# Allegro board remotepanasonicDB9-rout-V1.1.brd
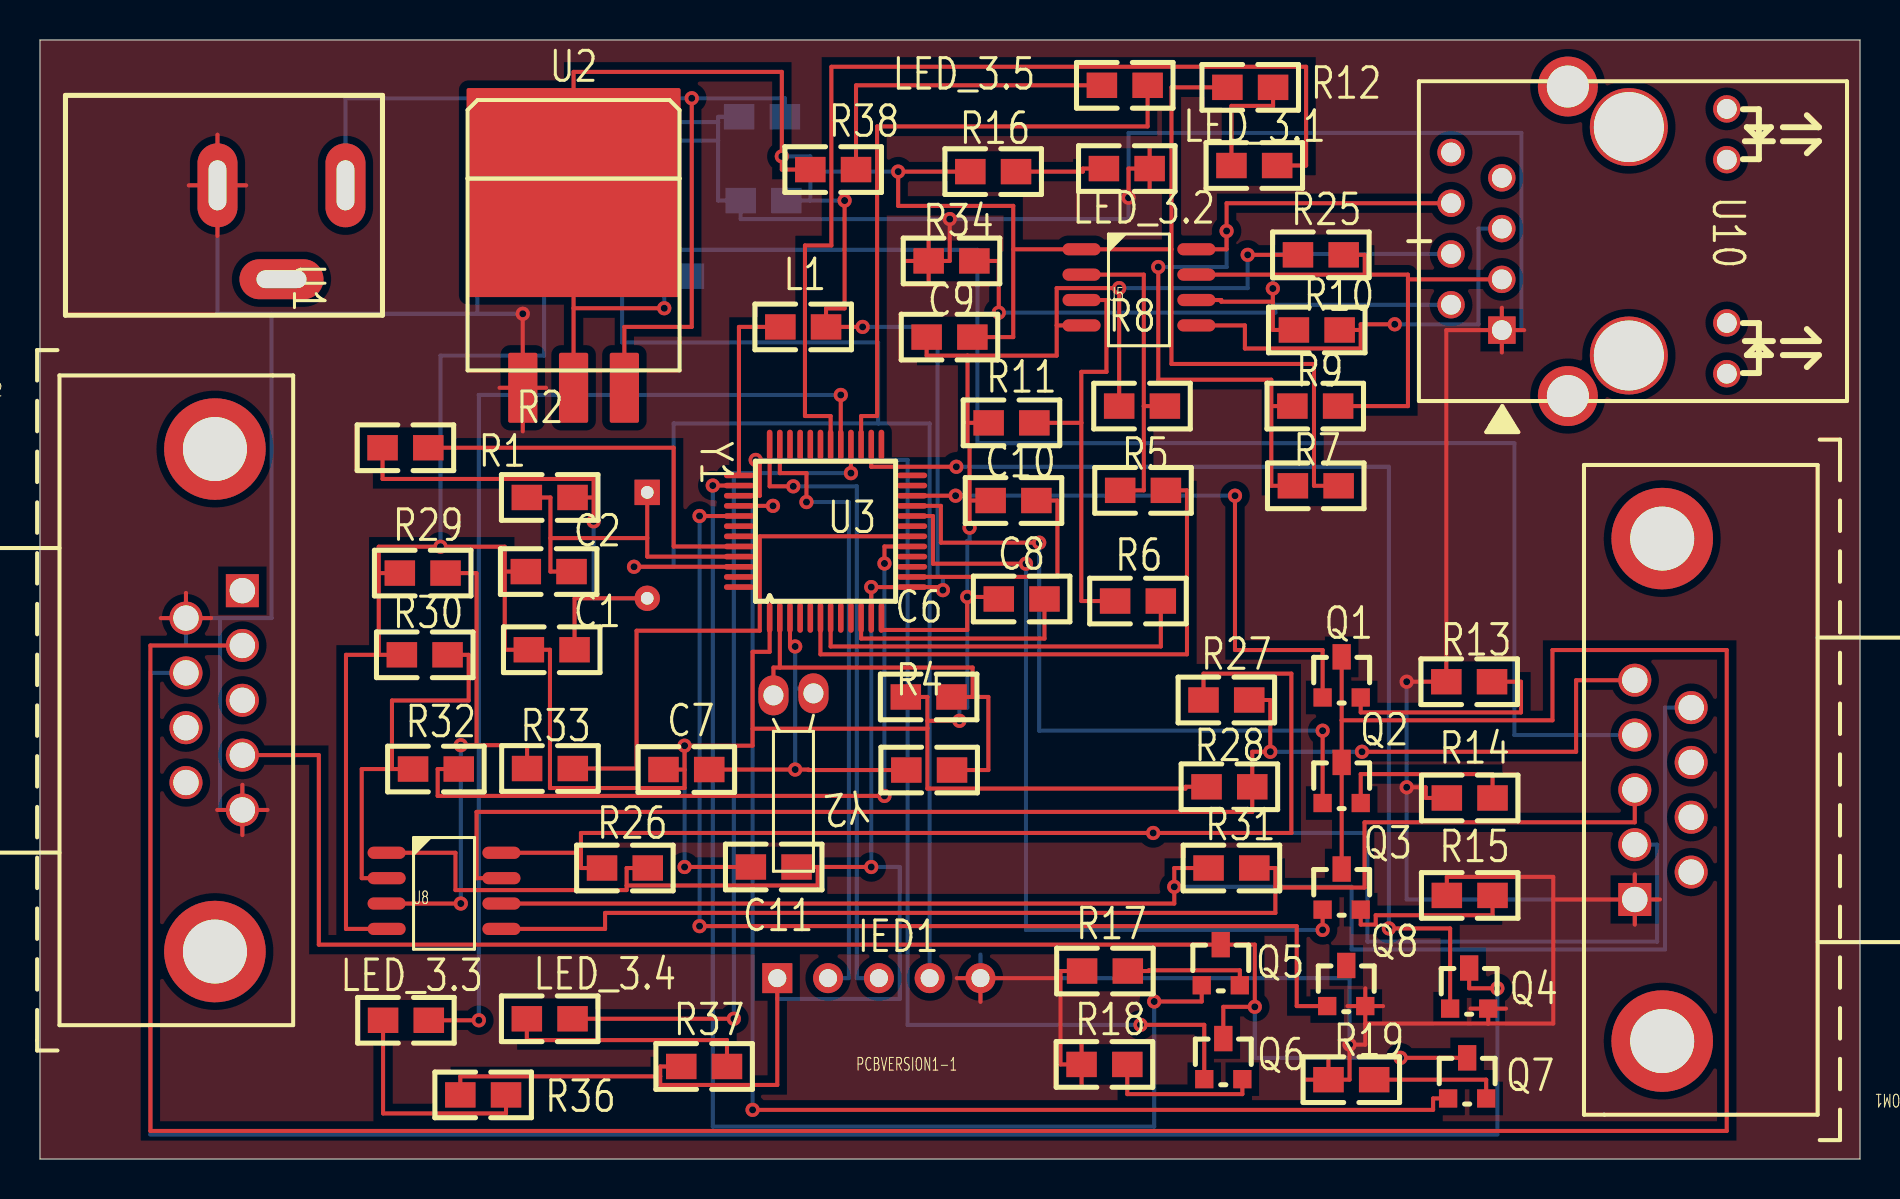
[diagram p0: board, top side]
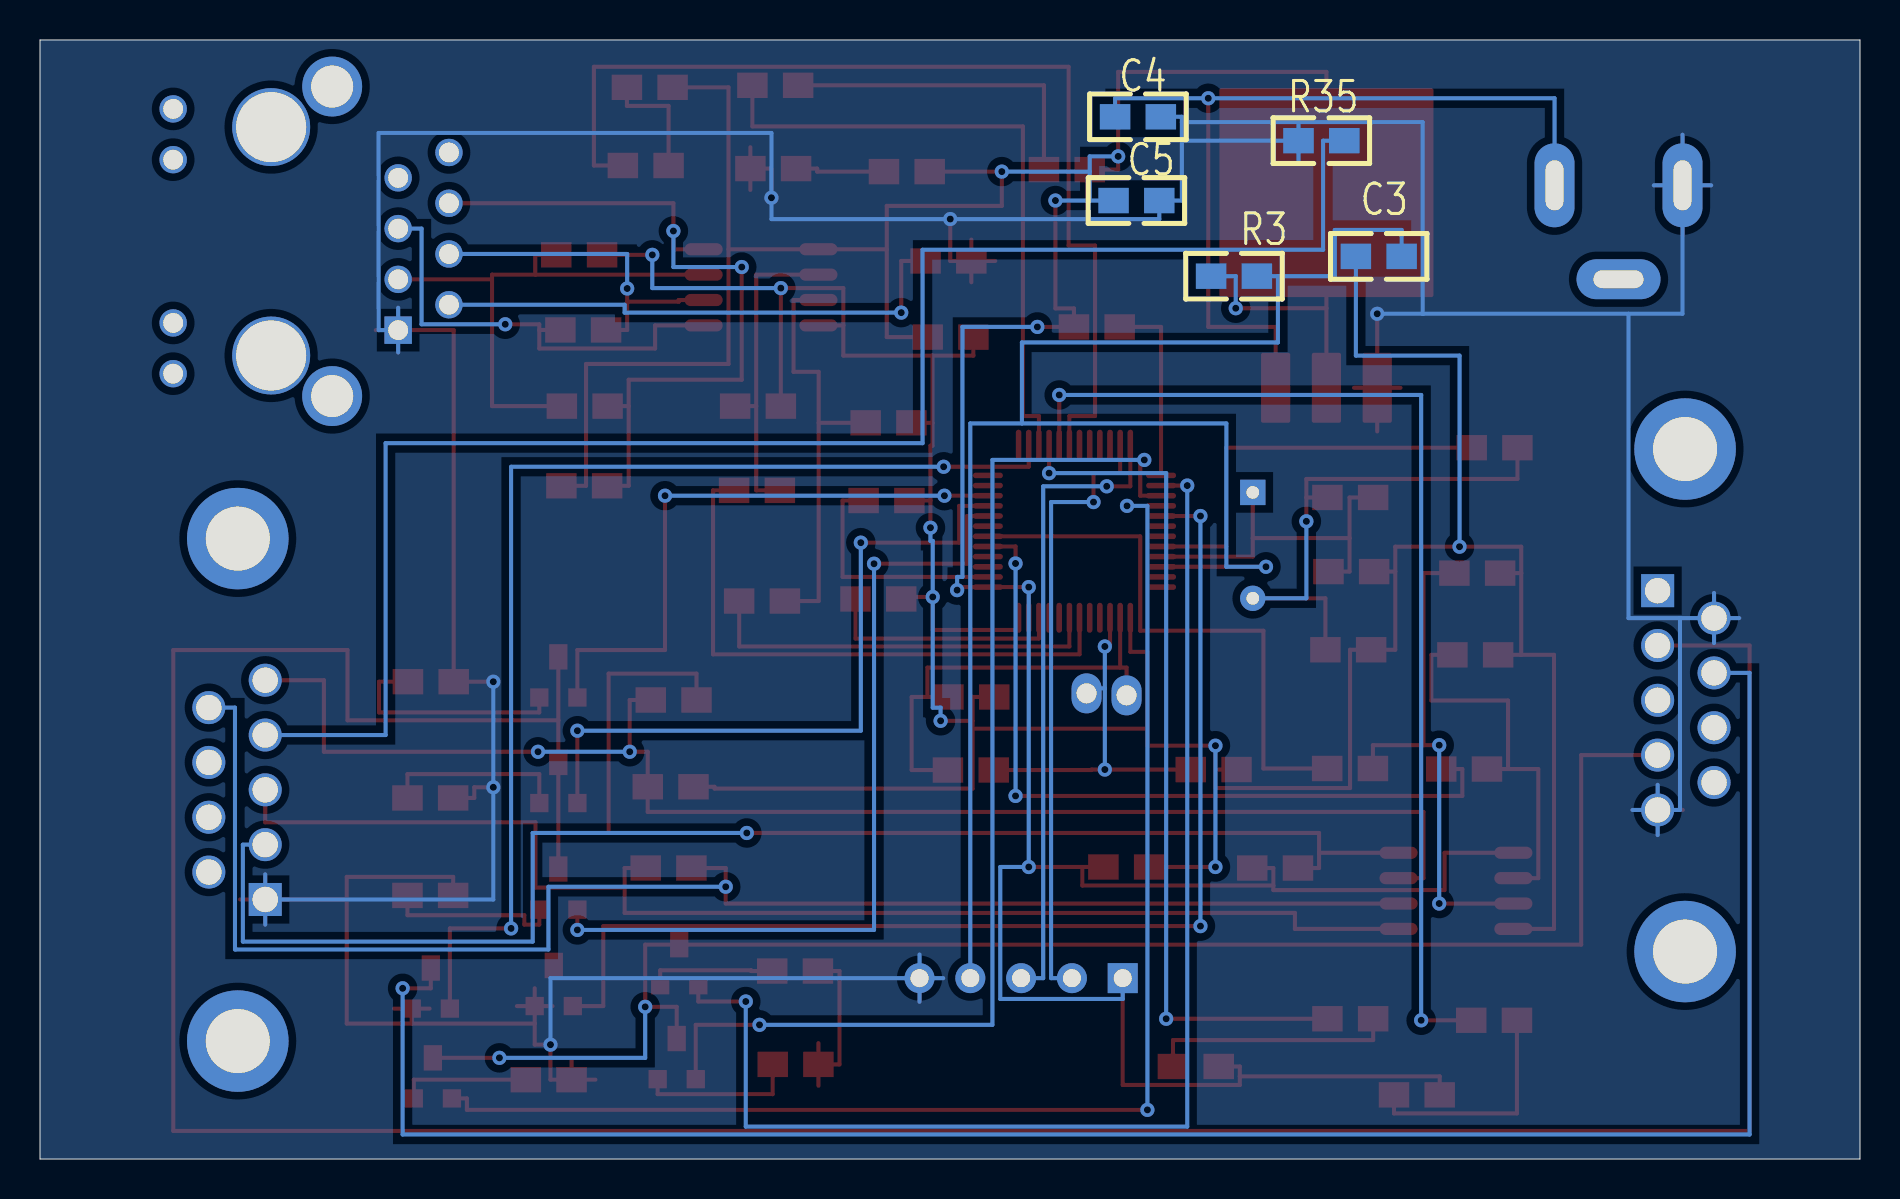
[diagram p1: board, bottom side, seen from below]

Outline 91 x 56 mm; copper layers: TOP, BOTTOM. Coordinates in mm from the lower left corner of the outline.
Outline path: 0,56 91,56 91,0 0,0 0,56

## Placement (name value [footprint] x y rotation side)
C1  20p  [0805]  25.59 25.49 0 top
C2  20p  [0805]  25.43 29.4 0 top
C3  10u  [0805]  24.06 45.17 180 bottom
C4  10U  [0805]  36.1 52.16 180 bottom
C5  22U  [0805]  36.18 47.96 180 bottom
C6  20p  [0805]  44.43 23.12 0 top
C7  20p  [0805]  32.32 19.49 0 top
C8  10u  [0805]  49.08 28.03 0 top
C9  0.1u  [0805]  45.47 41.13 0 top
C10  0.1u  [0805]  48.68 32.95 0 top
C11  0.1u  [0805]  36.69 14.61 0 top
COM1  BOXCONN_DB9  [DB9RA_M]  79.74 18.47 180 top
COM2  BOXCONN_DB9  [DB9RA_M]  10.12 22.96 0 top
IED1  <Value>  [HDR1X5]  36.86 9.05 0 top
L1  IND_MOLDED  [0805]  38.16 41.64 0 top
LED_3.1  RED  [0805]  60.71 49.72 0 top
LED_3.2  RED  [0805]  54.34 49.56 0 top
LED_3.3  RED  [0805]  18.3 6.94 0 top
LED_3.4  RED  [0805]  25.48 7.02 0 top
LED_3.5  RED  [0805]  54.24 53.73 0 top
Q1  2N7002LT1  [SOT23_B]  65.08 24.09 0 top
Q2  2N7002LT1  [SOT23_B]  65.08 18.81 0 top
Q3  2N7002LT1  [SOT23_B]  65.08 13.47 0 top
Q4  2N7002LT1  [SOT23_B]  71.46 8.52 0 top
Q5  2N7002LT1  [SOT23_B]  59.04 9.69 0 top
Q6  2N7002LT1  [SOT23_B]  59.17 4.99 0 top
Q7  2N7002LT1  [SOT23_B]  71.36 4.02 0 top
Q8  2N7002LT1  [SOT23_B]  65.31 8.65 0 top
R1  33  [0805]  18.27 35.59 0 top
R2  1M  [0805]  25.48 33.11 0 top
R3  10k  [0805]  31.3 44.18 180 bottom
R4  10M  [0805]  44.46 19.47 0 top
R5  22  [0805]  55.15 33.46 0 top
R6  22  [0805]  54.9 27.92 0 top
R7  4.7k  [0805]  63.79 33.69 0 top
R8  10k  [0805]  55.1 37.68 0 top
R9  100  [0805]  63.76 37.68 0 top
R10  100  [0805]  63.84 41.49 0 top
R11  10k  [0805]  48.57 36.84 0 top
R12  330  [0805]  60.51 53.63 0 top
R13  4.7k  [0805]  71.46 23.89 0 top
R14  10k  [0805]  71.48 18.07 0 top
R15  15k  [0805]  71.48 13.19 0 top
R16  330  [0805]  47.66 49.41 0 top
R17  4.7k  [0805]  53.25 9.41 0 top
R18  10k  [0805]  53.22 4.73 0 top
R19  15k  [0805]  65.57 3.97 0 top
R25  4.7k  [0805]  64.04 45.25 0 top
R26  4.7k  [0805]  29.24 14.56 0 top
R27  100  [0805]  59.32 22.97 0 top
R28  4.7k  [0805]  59.47 18.63 0 top
R29  10k  [0805]  19.13 29.32 0 top
R30  10k  [0805]  19.24 25.23 0 top
R31  100  [0805]  59.57 14.56 0 top
R32  22  [0805]  19.8 19.52 0 top
R33  22  [0805]  25.5 19.54 0 top
R34  0  [0805]  45.58 44.94 0 top
R35  0  [0805]  26.93 50.96 180 bottom
R36  330  [0805]  22.16 3.21 0 top
R37  330  [0805]  33.21 4.63 0 top
R38  330  [0805]  39.66 49.51 0 top
U1  DC205A  [DC205]  15.27 48.73 270 top
U2  AMS1086CM-3.3  [TO262]  26.68 45.09 0 top
U3  NUC122LC1AN  [NUC122LQFP48]  36.48 27.09 0 top
U5  MAX488  [SOP8]  52.08 45.53 0 top
U8  MAX488  [SOP8]  17.33 15.33 0 top
U10  RJ45  [HR911105A]  68.94 45.93 270 top
Y1  12M  [XALTDIP2]  30.36 33.36 270 top
Y2  32k  [XTAL-3_4MM-2P]  38.97 23.4 180 top

## Library data of the parts
C1-C3 C6-C11 = CAPACITOR NON-POL
C4 C5 = CAP NP
COM1 COM2 = CONNECTOR DB9_1
IED1 = CON5
L1 R1-R11 R13-R15 R17-R19 R25-R35 = R
LED_3.1-LED_3.5 = LED
Q1-Q8 = NPN_3
R12 R16 R36-R38 = RES1
U1 = DC205A
U2 = AMS1117: Tolerance: RichardLC; User Part Number: pn
U3 = NUC122LC1AN
U5 U8 = MAX485
U10 = RJ45
Y1 Y2 = CRYSTAL

## Footprints (pads in the part's own frame, mm; a bottom-side part is the same pattern mirrored in y, then rotated)
0805
  rect 1.524x1.27 smd: 1(-1.143,0) 2(1.143,0)
DB9RA_M
  rect 1.651x1.651 hole 1.27: 1(0,5.486)
  round 1.651 hole 1.27: 2(0,2.743) 3(0,0) 4(0,-2.743) 5(0,-5.486) 6(-2.819,4.115) 7(-2.819,1.372) 8(-2.819,-1.372) 9(-2.819,-4.115)
  round 5.08 hole 3.2: 10(-1.372,12.573) 11(-1.372,-12.573)
DC205
  oval 4.2x2 hole 2.5x0.889: 1(0,0) 2(0,-6.4)
  oval 2x4.2 hole 0.889x2.5: 3(4.7,-3.2)
HDR1X5
  rect 1.5x1.5 hole 0.9: 1(0,0)
  round 1.5 hole 0.9: 2(2.54,0) 3(5.08,0) 4(7.62,0) 5(10.16,0)
HR911105A
  round 3.9 hole 3.5 unplated: (-5.707,10.498) (5.723,10.498)
  rect 1.372x1.372 hole 0.991: 1(4.453,4.148)
  round 1.372 hole 0.991: 2(3.183,1.608) 3(1.913,4.148) 4(0.643,1.608) 5(-0.627,4.148) 6(-1.897,1.608) 7(-3.167,4.148) 8(-4.437,1.608) 9(6.633,15.398) 10(4.093,15.398) 11(-4.077,15.398) 12(-6.617,15.398)
  round 2.997 hole 2.1: M3(-7.737,7.448) M4(7.753,7.448)
NUC122LQFP48
  oval 0.279x1.5 smd: 1(0,0) 2(0.508,0) 3(1.016,0) 4(1.524,0) 5(2.032,0) 6(2.54,0) 7(3.048,0) 8(3.556,0) 9(4.064,0) 10(4.572,0) 11(5.08,0) 12(5.588,0) 25(5.588,8.66) 26(5.08,8.66) 27(4.572,8.66) 28(4.064,8.66) 29(3.556,8.66) 30(3.048,8.66) 31(2.54,8.66) 32(2.032,8.66) 33(1.524,8.66) 34(1.016,8.66) 35(0.508,8.66) 36(0,8.66)
  oval 1.5x0.279 smd: 13(7.124,1.536) 14(7.124,2.044) 15(7.124,2.552) 16(7.124,3.06) 17(7.124,3.568) 18(7.124,4.076) 19(7.124,4.584) 20(7.124,5.092) 21(7.124,5.6) 22(7.124,6.108) 23(7.124,6.616) 24(7.124,7.124) 37(-1.536,7.124) 38(-1.536,6.616) 39(-1.536,6.108) 40(-1.536,5.6) 41(-1.536,5.092) 42(-1.536,4.584) 43(-1.536,4.076) 44(-1.536,3.568) 45(-1.536,3.06) 46(-1.536,2.552) 47(-1.536,2.044) 48(-1.536,1.536)
SOP8
  oval 1.905x0.61 smd: 1(0,0) 2(0,-1.27) 3(0,-2.54) 4(0,-3.81) 5(5.74,-3.81) 6(5.74,-2.54) 7(5.74,-1.27) 8(5.74,0)
SOT23_B
  rect 0.914x1.27 smd: D(0,1.041)
  rect 0.914x0.914 smd: G(-0.953,-0.991) S(0.953,-0.991)
TO262
  custom 1.46x3.5 smd: 1(-2.54,-6.5) 2(0,-6.5) 3(2.54,-6.5)
  custom 10.7x10.46 smd: 4(0,3.27)
XALTDIP2
  rect 1.27x1.27 hole 0.635: 1(0,0)
  round 1.27 hole 0.635: 2(5.3,0)
XTAL-3_4MM-2P
  oval 1.5x2 hole 1: 1(0.3,0.1) 2(2.3,0.2)

## Nets
GND: C4.2 C5.2 COM1.1 COM2.5 COM2.6 IED1.5 LED_3.2.2 Q4.S Q8.S R13.1 R14.1 R15.1 R17.1 R18.1 R19.1 R34.1 R35.1 U1.2(GND) U2.1(GND) U10.1
GND_POWER: C1.1 C2.1 C3.1 C6.1 C7.1 C8.1 C9.1 C10.1 C11.1 R8.1 R11.1 R25.1 R28.1 R29.1 R30.1 U3.1(PVSS) U3.12(VSS) U5.4(GND) U8.4(GND)
VCC: C5.1 C9.2 C11.2 IED1.1 L1.2 R3.1 R7.2 R12.1 R16.1 R26.2 R36.1 R37.1 R38.1 U2.2(VOUT) U2.4(TAB) U3.11(VDD) U3.13(VBUS) U5.1(VCC) U8.1(VCC)
VCC5: C4.1 U1.1(VCC) U2.3(VIN)
422AI: R7.1 R9.1 U5.8(A) U10.6
422AO: COM1.2 R26.1 R27.1 U8.8(A)
422BI: R9.2 R25.2 U5.7(B) U10.3
422BO: COM1.5 R27.2 R28.2 U8.7(B)
422YI: R10.2 U5.5(Y) U10.5
422YO: COM1.3 R31.2 U8.5(Y)
422ZI: R10.1 U5.6(Z) U10.4
422ZO: COM1.9 R31.1 U8.6(Z)
A_AUDIO: COM2.7 Q4.D
A_AUDIO-1: Q8.D
A_INPUT: Q4.G U3.26(PC12)
A_INPUT1: Q8.G U3.41(PD3)
B_AUDIO: COM2.2 Q1.D Q2.D Q3.D
B_AUDIO-1: COM2.4 Q5.D Q6.D Q7.D
B_NET1: Q1.G U3.22(PC0/SPISS00)
B_NET2: Q2.G U3.21(PC1/SPICLK0)
B_NET3: Q3.G U3.20(PC2/MISO00)
B_NET11: Q5.G U3.38(PD0)
B_NET21: Q6.G U3.39(PD1)
B_NET31: Q7.G U3.40(PD2)
ICECLK: IED1.3 U3.36(ICE_CK)
ICEDATA: IED1.2 U3.35(ICE_DAT)
ICEREST: C3.2 IED1.4 R3.2 U3.46(/RESET)
PC8: LED_3.1.2 U3.30(PC8/SPISS10)
PC9: LED_3.3.2 U3.29(PC9/SPICLK1)
PC10: LED_3.4.2 U3.28(PC10/MISO10)
PC11: LED_3.5.2 U3.27(PC11/MOS110)
RXI: R5.1 R8.2 U5.2(RO)
RXO: R30.2 R32.1 U8.2(RO)
TXI: R6.1 R11.2 U5.3(DI)
TXO: R29.2 R33.1 U8.3(DI)
N5217252: C1.2 R1.1 R2.2 Y1.2
N5217271: C2.2 R2.1 U3.45(XT1_IN) Y1.1
N5217301: R1.2 U3.44(XT1_OUT)
N5217606: L1.1 U3.37(AVDD)
N5217811: C6.2 R4.2 U3.2(X32O) Y2.2
N5217823: C7.2 R4.1 U3.3(X321) Y2.1
N5218166: R5.2 U3.6(RXD1/PB4)
N5218170: R6.2 U3.7(TXD1/PB5)
N5218267: C8.2 U3.10(LDO)
N5218423: C10.2 U3.14(VDD33)
N5271660: Q1.S R13.2
N5271664: Q2.S R14.2
N5271668: Q3.S R15.2
N5281203: Q5.S R17.2
N5281215: Q7.S R19.2
N5281219: Q6.S R18.2
N5286003: R32.2 U3.17(PB0/RXD0)
N5286012: R33.2 U3.18(PB1/TXD0)
N5287388: R34.2 U10.2
N5287624: COM1.4 R35.2
N5293616: COM2.11
N5294368: COM2.3
N52191170: LED_3.2.1 R16.2
N52191690: LED_3.1.1 R12.2
N52878630: LED_3.3.1 R36.2
N52879570: LED_3.4.1 R37.2
N52880520: LED_3.5.1 R38.2

Pads without a net: COM1 6 7 8 10 11; COM2 1 8 9 10; U1 3; U3 4 5 8 9 15 16 19 23 24 25 31 32 33 34 42 43 47 48; U10 7 8 9 10 11 12 M3 M4

## Via types
v1: diameter 0.711, hole 0.356, TOP to BOTTOM, 65 vias

## Routing (per net, layer and track width the routed paths; a pad name or vN(x,y) marks a point on that pad's centre or on a via; arc(x,y) is an arc through that point)
GND: length 331.8
  TOP w0.203: U10.1 73.09,42.6 ; U10.1 74.21,41.48 ; U10.1 70.32,41.48 R13.1 v1(68.33,23.89) ; U10.1 73.09,40.36 ; U2.1 v1(24.14,42.3) ; U2.1 22.98,38.59 ; U2.1 24.14,36.41 ; U2.1 25.3,38.59 ; 45.84,9.05 IED1.5 ; IED1.5 47.02,7.87 ; IED1.5 51.02,9.05 ; 75.66,12.99 COM1.1 ; 75.66,12.99 75.66,14.12 70.34,14.12 R15.1 ; 75.66,12.99 75.66,6.78 72.41,6.78 ; COM1.1 79.74,14.25 ; COM1.1 79.74,11.73 ; COM1.1 81,12.99 ; 71.52,7.53 Q4.S ; Q4.S 73.3,7.53 ; Q4.S 72.41,6.78 ; R34.1 45.49,44.94 v1(45.49,47.04) ; R34.1 43.24,44.94 ; R34.1 44.43,43.87 ; R34.1 44.43,46.01 ; R19.1 65.48,3.97 v1(65.48,5.72) 66.26,5.72 66.26,6.78 ; R19.1 64.42,5.04 ; R19.1 63.23,3.97 ; 51.02,9.05 51.02,9.41 R17.1 ; 51.02,9.05 51.02,4.73 R18.1 ; COM2.6 8.56,27.07 ; COM2.6 7.3,28.33 ; COM2.6 6.04,27.07 ; R18.1 52.08,3.67 ; R18.1 52.08,5.8 ; LED_3.2.2 54.43,49.56 v1(54.43,48.1) ; LED_3.2.2 55.48,48.5 ; LED_3.2.2 55.48,50.63 ; 8.87,46.19 U1.2 ; U1.2 7.44,48.73 ; U1.2 8.87,51.26 ; U1.2 10.31,48.73 ; v1(68.33,18.6) 69.29,18.6 69.29,18.07 R14.1 ; 10.12,16.21 COM2.5 ; COM2.5 8.86,17.47 ; COM2.5 10.12,18.73 ; COM2.5 11.38,17.47 ; 65.38,7.65 Q8.S ; Q8.S 67.15,7.65 ; Q8.S 66.26,6.78 ; Q8.S 66.26,8.54 ; 72.41,6.78 66.26,6.78
  BOTTOM w0.203: 33.9,50.96 33.9,47.96 C5.2 35.04,47.04 v1(45.49,47.04) 54.43,47.04 v1(54.43,48.1) 54.43,51.35 74.07,51.35 74.07,41.48 U10.1 ; 33.9,50.96 R35.1 ; 33.9,50.96 33.9,51.89 ; 28.08,49.89 R35.1 ; R35.1 28.08,52.03 ; 10.12,16.21 COM2.5 ; COM2.5 9,17.47 9,27.07 ; COM2.5 11.38,17.47 ; COM2.5 10.12,18.73 ; 45.84,9.05 IED1.5 ; IED1.5 47.02,10.23 ; IED1.5 65.48,9.05 v1(65.48,5.72) ; IED1.5 47.02,7.87 ; U10.1 73.09,42.6 ; U10.1 73.09,40.36 ; 9,27.07 11.58,27.07 11.58,42.3 ; 9,27.07 COM2.6 ; 79.74,11.73 COM1.1 ; COM1.1 68.33,12.99 v1(68.33,18.6) v1(68.33,23.89) ; COM1.1 79.74,14.25 ; 11.58,42.3 8.87,42.3 U1.2 ; 11.58,42.3 21.87,42.3 ; 7.3,25.81 COM2.6 ; COM2.6 6.04,27.07 ; COM2.6 7.3,28.33 ; 21.87,42.3 21.87,51.89 33.9,51.89 ; 21.87,42.3 v1(24.14,42.3) ; 33.9,51.89 33.9,52.16 C4.2 ; U1.2 7.44,48.73 ; U1.2 8.87,51.26 ; U1.2 10.31,48.73
GND_POWER: length 187.3
  TOP w0.203: R28.1 57.27,18.63 57.27,18.54 44.37,18.54 44.37,21.54 ; v1(45.97,21.93) 44.37,21.93 ; 44.37,21.93 44.37,23.12 C6.1 ; 44.37,21.93 44.37,21.54 ; 35.63,21.54 35.63,25.38 36.48,25.38 U3.1 ; 35.63,21.54 44.37,21.54 ; 35.63,21.54 35.63,20.68 v1(32.23,20.68) 32.23,19.49 ; 23.24,29.4 23.24,30.64 v1(20.02,30.64) 16.94,30.64 16.94,29.32 ; 23.24,29.4 23.24,25.49 C1.1 25.5,25.49 25.5,18.56 32.23,18.56 32.23,19.49 ; 23.24,29.4 C2.1 ; U3.12 42.07,26.48 46.36,26.48 v1(46.36,28.13) 47.94,28.13 C8.1 ; C11.1 v1(32.23,14.61) ; C9.1 44.33,40.2 46.38,40.2 ; 50.83,41.72 50.83,40.2 46.38,40.2 ; 50.83,41.72 50.83,43.58 v1(53.96,43.58) R8.1 ; 50.83,41.72 U5.4 ; 46.38,36.84 46.38,35.7 46.48,35.7 46.48,32.95 ; 46.38,36.84 46.38,40.2 ; 46.38,36.84 R11.1 ; 46.48,32.95 v1(46.48,31.59) ; 46.48,32.95 C10.1 ; 32.23,19.49 C7.1 ; R29.1 16.94,29.32 ; 16.94,29.32 16.94,25.23 ; 16.94,25.23 15.3,25.23 15.3,11.52 U8.4 ; 16.94,25.23 R30.1 ; R25.1 v1(60.38,45.25)
  BOTTOM w0.203: v1(53.96,43.58) 60.38,43.58 v1(60.38,45.25) ; v1(32.23,14.61) v1(32.23,20.68) ; v1(46.48,31.59) 46.48,30.93 46.36,30.93 v1(46.36,28.13) 46.36,22.59 45.97,22.59 v1(45.97,21.93) ; v1(20.02,30.64) 20.02,40.2 25.21,40.2 C3.1
VCC: length 224.6
  TOP w0.203: v1(40.23,47.96) 40.23,42.57 39.3,42.57 L1.2 v1(41.13,41.64) ; 38.88,14.61 38.88,13.69 29.33,13.69 ; 38.88,14.61 v1(41.56,14.61) ; 38.88,14.61 C11.2 ; 56.57,45.53 56.57,39.79 63.7,39.79 63.7,33.69 R7.2 ; 56.57,45.53 56.57,53.63 R12.1 ; 56.57,45.53 U5.1 48.66,45.53 ; 29.33,13.69 29.33,14.56 R26.2 ; 29.33,13.69 29.33,13.46 20.77,13.46 20.77,15.33 U8.1 ; 26.68,42.58 v1(31.21,42.58) ; 26.68,42.58 U2.4 26.68,54.4 37.09,54.4 v1(37.09,50.17) 37.09,49.51 R38.1 ; 26.68,42.58 U2.2 ; 31.01,4.14 31.01,3.7 36.86,3.7 IED1.1 ; 31.01,4.14 31.01,4.63 R37.1 ; 31.01,4.14 21.01,4.14 R36.1 ; 48.66,45.53 48.66,47.7 42.91,47.7 v1(42.91,49.41) R16.1 ; 48.66,45.53 48.66,41.13 C9.2 ; v1(45.14,28.47) 45.14,28.62 U3.13 v1(41.56,28.62) U3.11
  BOTTOM w0.203: 38.52,49.41 v1(42.91,49.41) ; 38.52,49.41 38.52,50.17 v1(37.09,50.17) ; 38.52,49.41 38.52,47.96 ; v1(41.56,28.62) v1(41.56,14.61) 42.99,14.61 42.99,8.01 36.86,8.01 IED1.1 ; C5.1 38.52,47.96 ; 38.52,47.96 v1(40.23,47.96) ; v1(31.21,42.58) 31.21,44.18 R3.1 ; v1(41.13,41.64) 44.88,41.64 44.88,29.13 45.14,29.13 v1(45.14,28.47)
VCC5: length 45.1
  TOP w0.203: U2.3 29.22,41.64 32.59,41.64 v1(32.59,53.08)
  BOTTOM w0.203: 37.25,52.16 37.25,53.08 v1(32.59,53.08) 15.27,53.08 U1.1
422AI: length 39
  TOP w0.203: R9.1 61.57,37.68 ; 61.57,37.68 61.57,33.69 R7.1 ; 61.57,37.68 61.57,39 55.91,39 v1(55.91,44.64) ; 57.82,45.53 59.33,45.53 v1(59.33,46.44) 59.33,47.83 U10.6
  BOTTOM w0.203: v1(55.91,44.64) 59.33,44.64 v1(59.33,46.44)
422AO: length 92.6
  TOP w0.203: U8.8 27.05,15.33 ; 27.05,15.33 27.05,14.56 R26.1 ; 27.05,15.33 27.05,16.32 v1(55.66,16.32) 62.57,16.32 62.57,24.29 58.17,24.29 R27.1
  BOTTOM w0.203: COM1.2 80.86,15.73 80.86,10.88 66.37,10.88 66.37,16.32 v1(55.66,16.32)
422BI: length 27.4
  TOP w0.203: 68.4,44.02 68.4,44.26 66.24,44.26 ; 68.4,44.02 68.4,37.68 R9.2 ; 68.4,44.02 U10.3 ; 66.24,44.26 66.24,45.25 65.19,45.25 ; 66.24,44.26 57.82,44.26
422BO: length 72.7
  TOP w0.203: R27.2 61.51,22.97 v1(61.51,20.38) 60.61,20.38 60.61,17.37 21.83,17.37 21.83,14.06 U8.7 ; v1(66.1,20.38) 76.81,20.38 76.81,23.96 COM1.5
  BOTTOM w0.203: v1(66.1,20.38) v1(61.51,20.38)
422YI: length 23.5
  TOP w0.203: 66.04,41.49 66.04,40.56 60.24,40.56 60.24,41.72 57.82,41.72 ; 66.04,41.49 R10.2 ; 66.04,41.49 66.04,41.77 v1(67.74,41.77)
  BOTTOM w0.203: v1(67.74,41.77) 71.92,41.77 71.92,46.56 U10.5
422YO: length 65.7
  TOP w0.203: COM1.3 79.74,16.85 66.23,16.85 66.23,13.59 61.77,13.59 ; 61.77,13.59 61.77,12.32 28.25,12.32 28.25,11.52 U8.5 ; 61.77,13.59 61.77,14.56 R31.2
422ZI: length 17.7
  TOP w0.203: R10.1 61.64,41.49 61.64,42.9 ; 61.64,42.9 59.06,42.9 59.06,42.99 57.82,42.99 ; 61.64,42.9 v1(61.64,43.56)
  BOTTOM w0.203: U10.4 61.64,45.29 v1(61.64,43.56)
422ZO: length 78.2
  TOP w0.203: U8.6 56.71,12.79 v1(56.71,13.62) 56.71,14.56 R31.1
  BOTTOM w0.203: v1(56.71,13.62) 65.58,13.62 65.58,10.49 81.25,10.49 81.25,22.59 COM1.9
A_AUDIO: length 102
  TOP w0.203: v1(72.87,8.54) 71.46,8.54 Q4.D
  BOTTOM w0.203: COM2.7 5.52,24.33 5.52,1.23 72.87,1.23 v1(72.87,8.54)
A_INPUT: length 57.2
  TOP w0.203: U3.26 41.56,34.64 v1(45.82,34.64) ; Q4.G 70.51,11.54 v1(67.45,11.54)
  BOTTOM w0.203: v1(45.82,34.64) 67.45,34.64 v1(67.45,11.54)
A_INPUT1: length 57.9
  TOP w0.203: Q8.G 62.84,7.65 62.84,11.66 v1(32.98,11.66) ; U3.41 v1(32.98,32.18)
  BOTTOM w0.203: v1(32.98,32.18) v1(32.98,11.66)
B_AUDIO: length 165.2
  TOP w0.203: 65.08,21.95 75.62,21.95 75.62,25.47 84.34,25.47 84.34,1.41 5.52,1.41 5.52,25.7 COM2.2 ; 65.08,21.95 Q2.D Q3.D ; 65.08,21.95 Q1.D
B_AUDIO-1: length 79.6
  TOP w0.203: Q6.D 59.17,7.62 v1(60.74,7.62) 60.74,10.73 Q5.D 13.94,10.73 13.94,20.21 COM2.4 ; Q7.D v1(68.03,5.06)
  BOTTOM w0.203: v1(68.03,5.06) 60.74,5.06 v1(60.74,7.62)
B_NET1: length 30.6
  TOP w0.203: v1(59.75,33.19) 59.75,25.47 64.13,25.47 Q1.G ; U3.22 v1(45.78,33.19)
  BOTTOM w0.203: v1(45.78,33.19) v1(59.75,33.19)
B_NET2: length 35.4
  TOP w0.203: v1(49.96,30.84) 45.04,30.84 45.04,32.69 U3.21 ; Q2.G v1(64.13,21.43)
  BOTTOM w0.203: v1(64.13,21.43) 49.96,21.43 v1(49.96,30.84)
B_NET3: length 42.3
  TOP w0.203: Q3.G v1(64.13,11.46) ; v1(49.3,29.79) 44.65,29.79 44.65,32.18 U3.20
  BOTTOM w0.203: v1(64.13,11.46) 49.3,11.46 v1(49.3,29.79)
B_NET11: length 64.9
  TOP w0.203: v1(55.71,7.88) 58.09,7.88 Q5.G ; U3.38 v1(33.64,33.7)
  BOTTOM w0.203: v1(33.64,33.7) 33.64,1.62 55.71,1.62 v1(55.71,7.88)
B_NET21: length 56.5
  TOP w0.203: U3.39 35.99,33.19 35.99,34.98 v1(35.78,34.98) ; v1(55.03,6.71) 58.21,6.71 Q6.G
  BOTTOM w0.203: v1(55.03,6.71) 43.38,6.71 43.38,34.98 v1(35.78,34.98)
B_NET31: length 68.3
  TOP w0.203: v1(35.63,2.46) 69.66,2.46 69.66,3.03 Q7.G ; U3.40 v1(36.65,32.69)
  BOTTOM w0.203: v1(36.65,32.69) 35.63,32.69 v1(35.63,2.46)
ICECLK: length 32.2
  TOP w0.203: v1(37.66,33.66) 36.48,33.66 U3.36
  BOTTOM w0.203: v1(37.66,33.66) 40.84,33.66 40.84,9.05 IED1.3
ICEDATA: length 31.2
  TOP w0.203: v1(38.32,32.88) 38.32,34.32 36.99,34.32 U3.35
  BOTTOM w0.203: v1(38.32,32.88) 40.45,32.88 40.45,9.05 IED1.2
ICEREST: length 86
  TOP w0.203: U3.46 v1(29.7,29.64)
  BOTTOM w0.203: R3.2 29.1,44.18 ; 29.1,44.18 29.1,40.86 41.9,40.86 41.9,36.81 ; 29.1,44.18 26.26,44.18 26.26,46.49 22.92,46.49 C3.2 ; 41.9,36.81 31.68,36.81 31.68,29.64 v1(29.7,29.64) ; 41.9,36.81 44.48,36.81 IED1.4
PC8: length 51.6
  TOP w0.203: LED_3.1.2 63.31,49.72 63.31,54.66 39.57,54.66 39.57,45.72 38.25,45.72 38.25,37.18 39.53,37.18 U3.30
PC9: length 54.4
  TOP w0.203: U3.29 v1(40.04,38.24) ; LED_3.3.2 v1(21.94,6.94)
  BOTTOM w0.203: v1(21.94,6.94) 21.94,38.24 v1(40.04,38.24)
PC10: length 42.6
  TOP w0.203: U3.28 v1(40.55,34.32) ; LED_3.4.2 v1(34.69,7.02)
  BOTTOM w0.203: v1(40.55,34.32) 34.69,34.32 v1(34.69,7.02)
PC11: length 32.3
  TOP w0.203: LED_3.5.2 55.38,51.67 41.86,51.67 41.86,37.18 41.06,37.18 U3.27
RXI: length 16.1
  TOP w0.203: R5.1 55.19,33.46 55.19,37.68 ; 55.19,37.68 R8.2 ; 55.19,37.68 55.19,44.26 U5.2
RXO: length 19.9
  TOP w0.203: R30.2 21.43,25.23 21.43,22.95 17.6,22.95 17.6,19.52 ; U8.2 16.09,14.06 16.09,19.52 17.6,19.52 ; 17.6,19.52 R32.1
TXI: length 21.6
  TOP w0.203: 52.07,36.84 52.07,39.39 53.32,39.39 53.32,42.99 U5.3 ; 52.07,36.84 52.07,27.92 53.76,27.92 ; 52.07,36.84 R11.2
TXO: length 26.3
  TOP w0.203: 21.83,20.71 21.83,29.32 R29.2 ; 21.83,20.71 v1(21.04,20.71) ; 21.83,20.71 24.35,20.71 R33.1 ; U8.3 v1(21.04,12.79)
  BOTTOM w0.203: v1(21.04,12.79) v1(21.04,20.71)
N5217252: length 28
  TOP w0.203: R1.1 17.13,34.03 27.68,34.03 27.68,33.11 ; Y1.2 26.73,28.06 C1.2 ; v1(27.68,31.91) 27.68,33.11 ; 27.68,33.11 R2.2
  BOTTOM w0.203: v1(27.68,31.91) 27.68,28.06 Y1.2
N5217271: length 18.6
  TOP w0.203: 25.52,31.07 25.52,29.4 C2.2 ; 25.52,31.07 25.52,33.11 R2.1 ; 25.52,31.07 30.36,31.07 ; 30.36,31.07 30.36,30.15 U3.45 ; 30.36,31.07 Y1.1
N5217301: length 20.5
  TOP w0.203: R1.2 31.68,35.59 31.68,30.65 U3.44
N5217606: length 9.5
  TOP w0.203: L1.1 34.95,41.64 U3.37
N5217811: length 22.6
  TOP w0.203: 36.99,24.59 46.63,24.59 46.63,23.12 ; 36.99,24.59 36.67,24.59 Y2.2 ; 36.99,24.59 U3.2 ; 46.63,23.12 47.42,23.12 47.42,19.47 R4.2 ; 46.63,23.12 C6.2
N5217823: length 18.9
  TOP w0.203: R4.1 38.42,19.47 38.42,19.49 v1(37.76,19.49) C7.2 ; v1(37.76,25.65) 37.5,25.65 U3.3
  BOTTOM w0.203: 37.76,23.55 v1(37.76,19.49) ; 37.76,23.55 v1(37.76,25.65) ; 37.76,23.55 38.67,23.55 Y2.1
N5218166: length 29.4
  TOP w0.203: R5.2 57.35,33.46 57.35,25.26 39.02,25.26 U3.6
N5218170: length 20.2
  TOP w0.203: R6.2 56.04,25.65 39.53,25.65 U3.7
N5218267: length 12.2
  TOP w0.203: C8.2 50.22,26.04 41.06,26.04 U3.10
N5218423: length 12.1
  TOP w0.203: C10.2 50.87,32.95 50.87,29.13 U3.14
N5271660: length 11.7
  TOP w0.203: Q1.S 66.04,22.35 74.05,22.35 74.05,23.89 R13.2
N5271664: length 9.2
  TOP w0.203: R14.2 72.63,19.26 66.04,19.26 Q2.S
N5271668: length 8.8
  TOP w0.203: R15.2 72.63,12.2 66.79,12.2 66.79,11.73 66.04,11.73 Q3.S
N5281203: length 6.4
  TOP w0.203: Q5.S 59.99,9.45 55.44,9.45 55.44,9.41 R17.2
N5281215: length 6.5
  TOP w0.203: Q7.S 72.31,3.97 R19.2
N5281219: length 8
  TOP w0.203: R18.2 54.36,3.25 60.12,3.25 Q6.S
N5286003: length 38.6
  TOP w0.203: R32.2 19.88,19.52 19.88,18.17 v1(42.22,18.17) ; U3.17 42.22,30.65 v1(42.22,29.8)
  BOTTOM w0.203: v1(42.22,29.8) v1(42.22,18.17)
N5286012: length 28.6
  TOP w0.203: U3.18 35.99,31.16 35.99,26.44 29.83,26.44 29.83,19.54 R33.2
N5287388: length 26.8
  TOP w0.203: v1(47.94,42.36) 47.94,44.94 R34.2
  BOTTOM w0.203: U10.2 61.77,42.75 61.77,42.36 v1(47.94,42.36)
N5287624: length 83.7
  BOTTOM w0.203: COM1.4 73.72,21.22 73.72,35.82 46.87,35.82 46.87,45.5 26.84,45.5 26.84,50.96 R35.2
N52191170: length 4.5
  TOP w0.203: R16.2 52.14,49.41 52.14,49.56 LED_3.2.1
N52191690: length 6
  TOP w0.203: LED_3.1.1 59.57,52.7 61.65,52.7 R12.2
N52878630: length 11.7
  TOP w0.203: LED_3.3.1 17.15,2.28 23.3,2.28 R36.2
N52879570: length 12.4
  TOP w0.203: LED_3.4.1 24.34,5.95 34.35,5.95 R37.2
N52880520: length 16.5
  TOP w0.203: R38.2 40.8,53.73 LED_3.5.1

## Copper pours and planes (outline as drawn; the poured copper is in the pictures)
GND on TOP: 0,0 0,56 91,56 91,0 ; 62 cut-outs
GND on BOTTOM: 0,0 0,56 91,56 91,0 ; 13 cut-outs

## Text on the board
Ref Des/Silkscreen Top: PCBVERSION1-1
COMPVAL_TYPE_TOP: FIGURE | SIZE | 14.0 | 25.0 | 35.43 | 39.0 | 39.37 | 50.0 | 82.68 | 126.0 | 137.8 | 98.42x35.0 | DRILL CHART: TOP to BOTTOM | ALL UNITS ARE IN MILS | PLATED | NON-PLATED | QTY | 65 | 2 | 5 | 1 | 11 | 18 | 4
